# Altium PCB 旧C车模连接板.PcbDoc
Units mil, origin at the board's own origin, x right, y up, seen from the top; angles counter-clockwise.
Board outline 5554.28 x 1067.01 mil, 2 copper layers (Top Layer, Bottom Layer); 8 components, 177 nets, 72 pads, 0 vias.
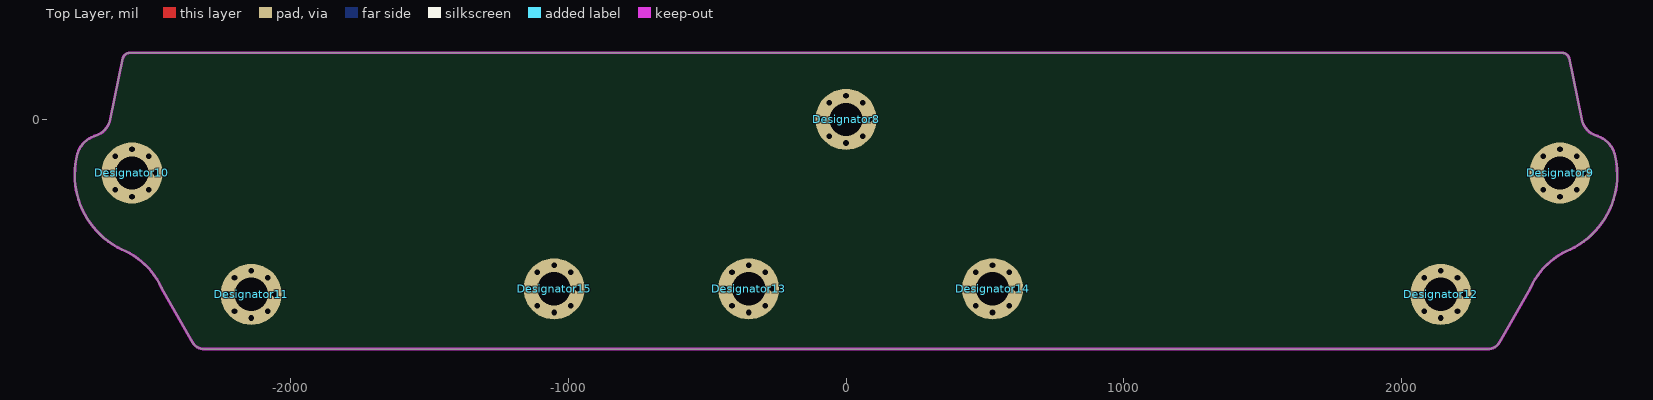
[diagram p0: Top Layer view]
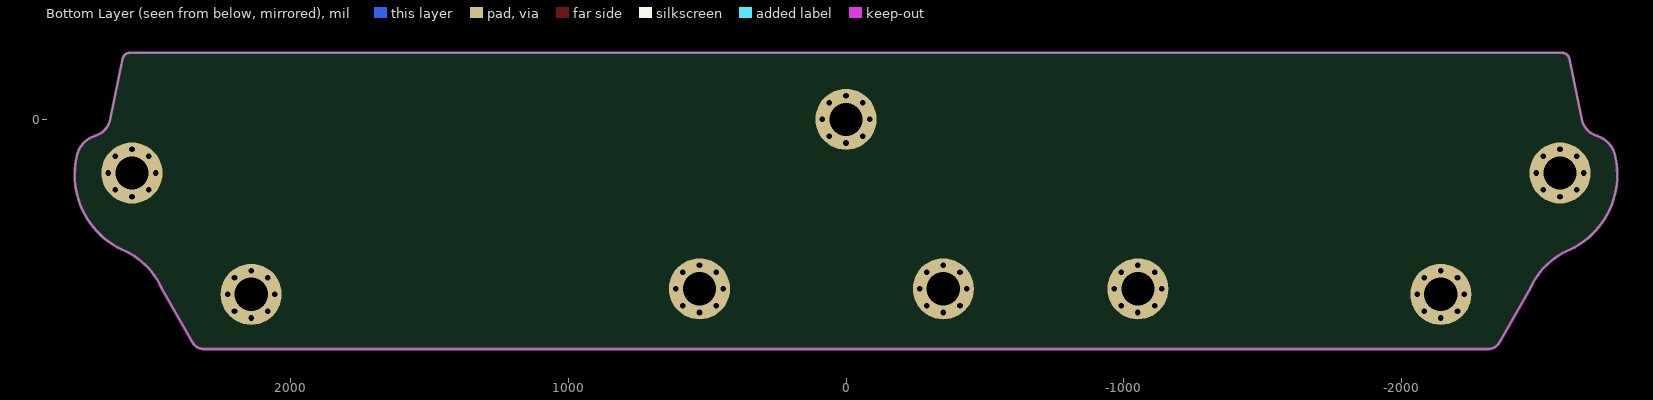
[diagram p1: Bottom Layer view, seen from below]

## Layer stack, top to bottom
Top Solder: solder mask 0.4, Solder Resist, Dk 3.5
Top Layer: signal copper 1.4
Dielectric 1: dielectric 12.6, FR-4, Dk 4.8
Bottom Layer: signal copper 1.4
Bottom Solder: solder mask 0.4, Solder Resist, Dk 3.5

## Board outline
-2464.75,-605.71 ccw(c-2710.35,-718.36) -2608.71,-468 cw(c-2478.74,-199.4) -2767.72,-125 cw(c-2674.38,-151.45) -2706.77,-60.01 ccw(c-2725.89,15.88) -2649.09,0.8 -2603.64,221.24 cw(c-2577.01,212.17) -2574.17,240.16 2574.17,240.16 cw(c2577.01,212.17) 2603.64,221.24 2649.09,0.8 ccw(c2725.89,15.88) 2706.77,-60.01 cw(c2674.38,-151.45) 2767.72,-125 cw(c2478.74,-199.4) 2608.71,-468 ccw(c2710.35,-718.36) 2464.75,-605.71 2356.65,-795.65 cw(c2310.91,-777.68) 2308.58,-826.77 -2308.58,-826.77 cw(c-2310.91,-777.68) -2356.65,-795.65

## Design rules (kind name [scope] priority, off if disabled: settings)
Clearance [All] p1: gap=8
ComponentClearance [All] p1: gap=0 collisioncheckmode=3 verticalgap=0 showdistances=FALSE
HoleSize [All] p1: absolutevalues=TRUE maxlimit=200 minlimit=5 maxpercent=80.000 minpercent=20.000
PlaneClearance [All] p1: clearance=10
PlaneConnect [All] p1: planeconnectstyle=Direct reliefexpansion=20 reliefentries=4 reliefconductorwidth=10 reliefairgap=10
PolygonConnect [All] p1: connectstyle=Direct reliefconductorwidth=10 reliefentries=4 polygonreliefangle="90 Angle" airgapwidth=10
RoutingVias [All] p1: holewidth=15 width=25 viastyle="Through Hole" minholewidth=5 minwidth=10 maxholewidth=180 maxwidth=200
ShortCircuit [InNet('No Net') vs InNet('No Net')] p1: allowed=TRUE
SilkToSilkClearance [All] p1: silktosilkclearance=0
SolderMaskExpansion [All] p1: expansion=4
Width [All] p1: maxlimit=200 minlimit=8 preferedwidth=100
24 further rules are at their usual default settings.

## Classes and differential pairs
component class 主板原理图: 0.1uF 4.7k

## Components (designator, comment, footprint, x,y, rotation, side; value= is the part's Value field where it differs from the comment)
Designator8 "Comment" 螺丝固定过孔 0,0 r0 top
Designator9 "Comment" 螺丝固定过孔 2570.87,-192.91 r0 top
Designator10 "Comment" 螺丝固定过孔 -2570.87,-192.91 r0 top
Designator11 "Comment" 螺丝固定过孔 -2141.73,-629.92 r0 top
Designator12 "Comment" 螺丝固定过孔 2141.73,-629.92 r0 top
Designator13 "Comment" 螺丝固定过孔 -350.39,-610.24 r0 top
Designator14 "Comment" 螺丝固定过孔 527.56,-610.24 r0 top
Designator15 "Comment" 螺丝固定过孔 -1051.18,-610.24 r0 top

## Footprints (in the part's own frame and the unit in brackets; to place one, negate y for a bottom-side part, rotate by r counter-clockwise, add the part's x,y. Pads: shape width x height; smd on the part's side, far side on the other; paste and mask are expansions set on the pad)
螺丝固定过孔 [mil] "螺丝固定过孔"
  round 30 hole 20: 1(-85,0) 1(-60,-60) 1(-60,60) 1(0,-85) 1(0,85) 1(60,-60) 1(60,60) 1(85,0)
  round 220 hole 120 unplated: 1(0,0)

## Nets (pads, with @x,y where several pads share a name; then routed paths per layer and width w, separated by ;. In a path a pad name is that pad's centre, name@x,y a point inside that pad or via, vN(x,y) a via of type N, cw(c..) or ccw(c..) an arc to the next point about the centre after c; other vN are vias at no path point)
1PWM+: 
1PWM+_1: 
1PWM-: 
1PWM-_1: 
2PWM+: 
2PWM+_1: 
2PWM-: 
2PWM-_1: 
3.3V_1: 
3.3V_1_1: 
3.3V_2: 
5V: 
5V_1: 
5V_2: 
6V: 
7.2V: 
7.2V_1: 
12V: 
A10: 
A11: 
A12: 
A13: 
A16: 
A18: 
A24: 
A25: 
A26: 
A27: 
A28: 
A29: 
B0: 
B1: 
B2: 
B3: 
B4: 
B5: 
B6: 
B7: 
B8: 
B9: 
BUZZER: 
C0: 
C1: 
C2: 
C3: 
C4: 
C5: 
C6: 
C7: 
C9: 
C16: 
C17: 
C18: 
C19: 
CE: 
CSN: 
D0: 
D1: 
D2: 
D3: 
D4: 
D5: 
D6: 
D7: 
D9: 
D9_1: 
D10: 
D10_1: 
D11: 
D11_1: 
D12: 
D12_1: 
D13: 
D13_1: 
D14: 
D14_1: 
E0: 
E0_1: 
E1: 
E1_1: 
E2: 
E2_1: 
E3: 
E3_1: 
E4: 
E4_1: 
E5: 
E5_1: 
E25: 
E26: 
GND: 
GND_1: 
GND_2: 
GND_3: 
GND_P: 
HOA1: 
HOA2: 
HOB1: 
HOB2: 
IRQ: 
LOA1: 
LOA2: 
LOB1: 
LOB2: 
MCU3.3V: 
MISO: 
MOSI: 
NetC6_2: 
NetC18_2: 
NetC19_2: 
NetC27_2: 
NetC28_2: 
NetD1_1: 
NetD2_1: 
NetD3_1: 
NetD4_1: 
NetD5_1: 
NetD6_1: 
NetD19_2: 
NetD20_2: 
NetD21_2: 
NetD22_2: 
NetLS1_2: 
NetMoter1_2: 
NetPower1_2: 
NetQ1_1: 
NetR7_1: 
NetR9_2: 
NetR10_1: 
NetR11_2: 
NetR12_1: 
NetR17_2: 
NetR18_1: 
NetR19_2: 
NetR20_1: 
OUTA1: 
OUTA2: 
OUTB1: 
OUTB2: 
PCLK: 
SCK: 
SERVO: 
UART0_RX: 
UART0_TX: 
UART3_RX: 
UART3_TX: 
VSY: 
YY_1: 
YY_2: 
YY_3: 
YY_4: 
YY_5: 
YY_6: 
YY_8: 
YY_9: 
YY_10: 
YY_11: 
YY_12: 
YY_13: 
YY_14: 
YY_15: 
YY_16: 
ZZF_1: 
ZZF_2: 
ZZF_3: 
ZZF_4: 
ZZF_5: 
ZZF_6: 
ZZF_8: 
ZZF_9: 
ZZF_10: 
ZZF_11: 
ZZF_12: 
ZZF_13: 
ZZF_14: 
ZZF_15: 
ZZF_16: 
pads on no net: Designator8.1 Designator9.1 Designator10.1 Designator11.1 Designator12.1 Designator13.1 Designator14.1 Designator15.1

## Keep-outs
Keep-Out Layer:
  the board outline again, w10